# EAGLE board ctrl_board (EAGLE 7.6.0)

Size 101.6 x 38.1 mm. Coordinates in mm from the lower left corner, seen from the top.
Outline: 101.58,0 0,0 0,38.1 101.6,38.1 101.6,0
Copper layers (1*16): Top 0.035mm / dielectric 1.5mm / Bottom 0.035mm
Design rules "default": minimum track width 10mil, minimum drill 24mil, track to track 8mil, track to pad 8mil, pad to pad 8mil, via to via 8mil, smd to smd 8mil, copper to edge 40mil, drill to drill 8mil, minimum pad ring 10mil, minimum via ring 8mil, stop-mask expansion 4mil, vias tented up to drill 0mil, thermal gap 10mil
Net classes: 0 default: width 0.203 mm; 1 vcc: width 0.254 mm
Holes 5.08 mm at 6.35,6.35 95.25,6.35 6.35,95.25 95.25,95.25

## Footprints (pad centres in the part's own frame; a part is rotated, then mirrored left to right if it is on the bottom)
C0805 = smd 1.3 x 1.5: 1 -0.85,0; 2 0.85,0
W237-102 = drill 1.194 long: 1 -2.5,-1.27; 2 2.5,-1.27
TO220H = drill 1.118 long: 1 -2.54,-10.16; 2 0,-10.16; 3 2.54,-10.16 | hole 3.302: 0,4.826
1X14 = drill 1.016 pad 1.88: 1 0,0; 2 2.54,0; 3 5.08,0; 4 7.62,0; 5 10.16,0; 6 12.7,0; 7 15.24,0; 8 17.78,0; 9 20.32,0; 10 22.86,0; 11 25.4,0; 12 27.94,0; 13 30.48,0; 14 33.02,0
XBEE-1 = drill 0.8 pad 1.524: 1 -11,20; 2 -11,18; 3 -11,16; 4 -11,14; 5 -11,12; 6 -11,10; 7 -11,8; 8 -11,6; 9 -11,4; 10 -11,2; 11 11,2; 12 11,4; 13 11,6; 14 11,8; 15 11,10; 16 11,12; 17 11,14; 18 11,16; 19 11,18; 20 11,20
1X05 = drill 1.016 pad 1.88: 1 0,0; 2 2.54,0; 3 5.08,0; 4 7.62,0; 5 10.16,0
1X03 = drill 1.016 pad 1.88: 1 0,0; 2 2.54,0; 3 5.08,0
2X3_POGO = drill 1.2 pad 1.829 octagon: P$1 0,0; P$2 0,2.54; P$3 2.54,0; P$4 2.54,2.54; P$5 5.08,0; P$6 5.08,2.54
LED-0603 = smd 1 x 1: A 0,-0.877; C 0,0.877
0603-RES = smd 1.1 x 1: 1 -0.85,0; 2 0.85,0
TACTILE-SWITCH-SMD = smd 1.524 x 0.762: 1 -2.794,1.905; 2 2.794,1.905; 3 -2.794,-1.905; 4 2.794,-1.905
TEENSY3-ALL_PINS = drill 0.965: 0 -7.62,13.97; 1 -7.62,11.43; 2 -7.62,8.89; 3 -7.62,6.35; 3.3V 7.62,11.43; 3.3V1 -2.54,-16.51; 4 -7.62,3.81; 5 -7.62,1.27; 6 -7.62,-1.27; 7 -7.62,-3.81; 8 -7.62,-6.35; 9 -7.62,-8.89; 10 -7.62,-11.43; 11 -7.62,-13.97; 12 -7.62,-16.51; 13 7.62,-16.51; 14/A0 7.62,-13.97; 15/A1 7.62,-11.43; 16/A2 7.62,-8.89; 17/A3 7.62,-6.35; 18/A4 7.62,-3.81; 19/A5 7.62,-1.27; 20/A6 7.62,1.27; 21/A7 7.62,3.81; 22/A8 7.62,6.35; 23/A9 7.62,8.89; A10 5.08,6.35; A11 5.08,3.81; AGND 7.62,13.97; AREF 5.08,8.89; GND -7.62,16.51; GND1 0,-16.51; PGM 2.54,-16.51; RESET/DAC 5.08,-16.51; VBAT -5.08,-16.51; VIN 7.62,16.51; VUSB 5.08,13.97

## Placement (x,y rotation side)
C1  0.33uF  [C0805]  13.59,12.7 90 top
C2  0.1uF  [C0805]  18.67,12.7 270 top
CTRL1+  [W237-102]  4.57,15.75 90 top
CTRL2  [W237-102]  30.99,34.04 0 top
CTRL3  [W237-102]  -25.65,-1.91 0 top  (outside the outline)
CTRL4  [W237-102]  -45.97,-1.91 0 top  (outside the outline)
IC1  7805T  [TO220H]  16.13,27.94 0 top
J1  [1X14]  97.28,4.06 180 top
J2  [1X14]  64.26,28.19 0 top
JP1  [XBEE-1]  30.1,15.37 270 top
JP5  DNP  [1X05]  70.61,33.27 0 top
JP6  DNP  [1X03]  85.85,33.27 0 top
LB  [2X3_POGO]  46.99,96.52 0 top  (outside the outline)
LED1  Red  [LED-0603]  52.96,30.61 180 top
LED2  Red  [LED-0603]  49.15,30.61 180 top
LED3  Green  [LED-0603]  45.34,30.61 180 top
LED4  Green  [LED-0603]  40.26,30.61 180 top
LED5  Green  [LED-0603]  37.08,1.14 0 top
LF  [2X3_POGO]  60.96,96.52 0 top  (outside the outline)
R1  1k  [0603-RES]  49.15,34.42 270 top
R2  1k  [0603-RES]  34.54,1.14 90 top
R3  1k  [0603-RES]  45.34,34.42 270 top
R4  1k  [0603-RES]  40.26,34.42 90 top
R11  1k  [0603-RES]  52.96,34.42 90 top
RB  [2X3_POGO]  43.18,2.54 0 top
RF  [2X3_POGO]  54.61,2.54 0 top
S3  Reset  [TACTILE-SWITCH-SMD]  58.55,15.88 0 top
TO_PWRBRD_PWR  [W237-102]  5.46,31.5 180 top
TO_PWRBRD_SINGNALS  [2X3_POGO]  1.14,-4.7 0 top
U$1  TEENSY_3.0_ALL_PINS  [TEENSY3-ALL_PINS]  80.77,16.76 90 top
VIN  [W237-102]  17.78,6.35 0 top

## Library data of the parts
C1 C2 = adafruit
CTRL1+ CTRL2-CTRL4 TO_PWRBRD_PWR VIN = con-wago-500; MPN: 237-102; OC_FARNELL: unknown; OC_NEWARK: 70K9898
IC1 = linear
J1 J2 JP5 JP6 = SparkFun-Connectors
JP1 = SparkFun-RF
LB LF RB RF TO_PWRBRD_SINGNALS = SparkFun-Connectors; PROD_ID: HW-11044
LED1 LED2 = SparkFun-LED; PROD_ID: DIO-00819
LED3-LED5 = SparkFun-LED; PROD_ID: DIO-00821
R1-R4 R11 = SparkFun-Resistors; PROD_ID: RES-07856
S3 = SparkFun-Electromechanical; PROD_ID: SWCH-08247
U$1 = Teensy_3_and_LC_Series_Boards_v1.1

## Nets
3.3V: J2.2 JP1.1 JP5.2 R1.1 R3.1 R11.2 U$1.3.3V U$1.3.3V1
+5V: C2.1 IC1.3 U$1.VIN
+24V: C1.1 CTRL3.1 CTRL4.1 IC1.1 TO_PWRBRD_PWR.1 VIN.1
A14/DAC: JP5.5 U$1.RESET/DAC
AREF: U$1.AREF
CHARGE: J1.5 TO_PWRBRD_SINGNALS.P$5 U$1.8
CHIP: J1.2 TO_PWRBRD_SINGNALS.P$6 U$1.11
CTS: JP1.12
DIO0: JP1.20
DIO1: JP1.19
DIO2: JP1.18
DIO3: JP1.17
DIO4: JP1.11
DIO5: JP1.15 R2.2
DIO9: JP1.13
DIO11: JP1.7
DIO12: JP1.4
DISCHARGE: J1.4 U$1.9
DRIBBLE: J1.3 TO_PWRBRD_SINGNALS.P$4 U$1.10
DTR: JP1.9
GND: C1.2 C2.2 CTRL1+.2 CTRL2.2 CTRL3.2 IC1.2 J1.14 JP1.10 JP5.3 JP6.1 JP6.2 JP6.3 LB.P$1 LED1.C LED4.C LED5.C LF.P$1 RB.P$1 RF.P$1 S3.3 TO_PWRBRD_PWR.2 U$1.GND U$1.GND1 VIN.2
LBBRK: J1.6 LB.P$4 U$1.7
LBDIR: J1.7 LB.P$3 U$1.6
LBENA: J1.8 LB.P$2 U$1.5
LBSPEED: J2.5 LB.P$5 U$1.22/A8
LFBRK: J1.9 LF.P$4 U$1.4
LFDIR: J1.10 LF.P$3 U$1.3
LFENA: J1.11 LF.P$2 U$1.2
LFSPEED: J2.4 LF.P$5 U$1.23/A9
N$1: J1.1 U$1.12
N$2: CTRL1+.1 CTRL2.1
N$12: LED1.A R11.1
N$17: LED2.A R1.2
N$18: J2.3 U$1.AGND
N$19: LED3.A R3.2
N$43: LED4.A R4.1
N$139: LED5.A R2.1
P13: J2.14 U$1.13
PROG: JP5.4 U$1.PGM
RBBRK: J2.13 RB.P$4 U$1.14/A0
RBDIR: J2.12 RB.P$3 U$1.15/A1
RBENA: J2.11 RB.P$2 U$1.16/A2
RBSPEED: J2.7 RB.P$5 U$1.20/A6
READ_250: TO_PWRBRD_SINGNALS.P$1 U$1.A11
READ_CAP: TO_PWRBRD_SINGNALS.P$3 U$1.A10
RES: JP1.8
RES2: JP1.14
RESET: JP1.5 S3.1
RFBRK: J2.10 RF.P$4 U$1.17/A3
RFDIR: J2.9 RF.P$3 U$1.18/A4
RFENA: J2.8 RF.P$2 U$1.19/A5
RFSPEED: J2.6 RF.P$5 U$1.21/A7
RSSI: JP1.6 R4.2
RTS: JP1.16
UART_RX: J1.13 JP1.2 LED2.C U$1.0
UART_TX: J1.12 JP1.3 LED3.C U$1.1
VBAT: JP5.1 U$1.VBAT
VUSB: U$1.VUSB

## Tracks (layer width: path | path; a pad name or v marks a point on that pad's centre or on a via)
3.3V  (7 unrouted)
+5V  (2 unrouted)
+24V  (5 unrouted)
A14/DAC  (1 unrouted)
CHARGE  (2 unrouted)
CHIP  (2 unrouted)
DIO5  (1 unrouted)
DISCHARGE  (1 unrouted)
DRIBBLE  (2 unrouted)
GND  (23 unrouted)
LBBRK  (2 unrouted)
LBDIR  (2 unrouted)
LBENA  (2 unrouted)
LBSPEED  (2 unrouted)
LFBRK  (2 unrouted)
LFDIR  (2 unrouted)
LFENA  (2 unrouted)
LFSPEED  (2 unrouted)
N$1  (1 unrouted)
N$2  (1 unrouted)
N$12  (1 unrouted)
N$17  (1 unrouted)
N$18  (1 unrouted)
N$19  (1 unrouted)
N$43  (1 unrouted)
N$139  (1 unrouted)
P13  (1 unrouted)
PROG  (1 unrouted)
RBBRK  (2 unrouted)
RBDIR  (2 unrouted)
RBENA  (2 unrouted)
RBSPEED  (2 unrouted)
READ_250  (1 unrouted)
READ_CAP  (1 unrouted)
RESET  (1 unrouted)
RFBRK  (2 unrouted)
RFDIR  (2 unrouted)
RFENA  (2 unrouted)
RFSPEED  (2 unrouted)
RSSI  (1 unrouted)
UART_RX  (3 unrouted)
UART_TX  (3 unrouted)
VBAT  (1 unrouted)

## Text on the board
tPlace: + | + | BACK | FRONT | + | +